# EAGLE board 00B-060 (EAGLE 6.3)
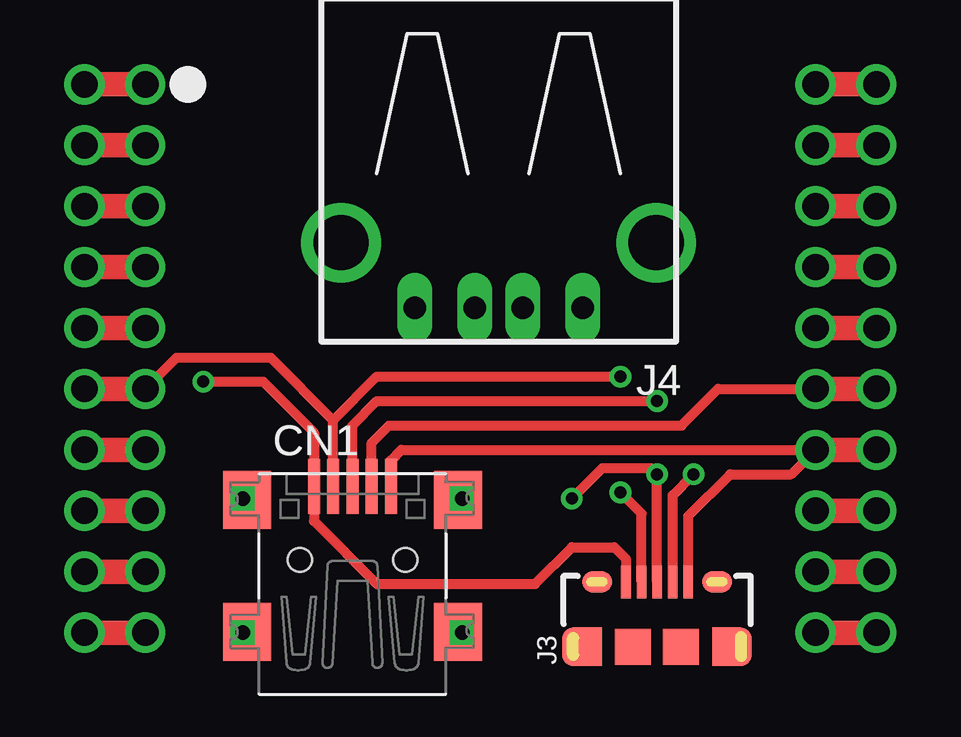
[diagram p0: board, top side]
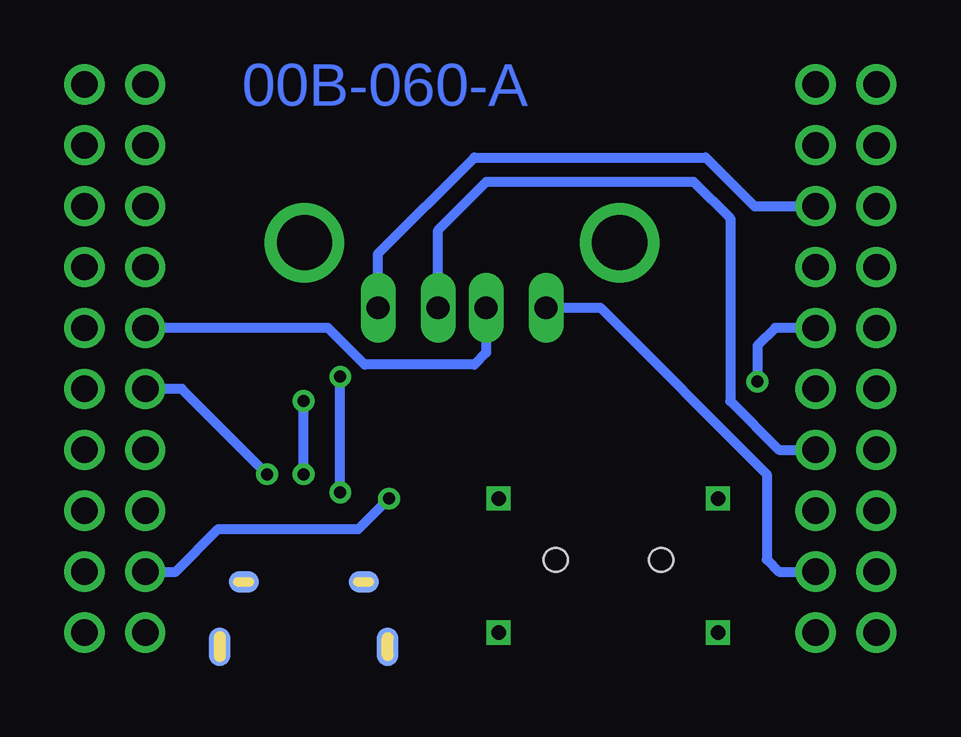
[diagram p1: board, bottom side, seen from below]

No outline drawn. Coordinates in mm, seen from the top.
Copper layers (1*16): Top 0.035mm / dielectric 1.5mm / Bottom 0.035mm
Design rules "default": minimum track width 10mil, minimum drill 24mil, track to track 8mil, track to pad 8mil, pad to pad 8mil, via to via 8mil, smd to smd 8mil, copper to edge 40mil, drill to drill 8mil, minimum pad ring 10mil, minimum via ring 8mil, stop-mask expansion 4mil, vias tented up to drill 0mil, thermal gap 10mil

## Footprints (pad centres in the part's own frame; a part is rotated, then mirrored left to right if it is on the bottom)
USB-MINIB = smd 0.5 x 2.308: D+ 0,4.064; D- -0.8,4.064; GND 1.6,4.064; ID 0.8,4.064; VBUS -1.6,4.064 | smd 2 x 2.4: GND1 -4.4,-2; GND2 -4.4,3.5; GND3 4.4,3.5; GND4 4.4,-2 | hole 1: -2.2,1; 2.2,1
USB_MICRO = smd 0.4 x 1.35: 1 -1.3,1.35; 2 -0.65,1.35; 3 0,1.35; 4 0.65,1.35; 5 1.3,1.35 | smd 1.25 x 0.9: GND1 -2.5,1.35; GND4 2.5,1.35 | smd 1.25 x 0.9 bottom: GND2 -2.5,1.35; GND3 2.5,1.35 | smd 0.9 x 1.6: GND5 -3.5,-1.35; GND8 3.5,-1.35 | smd 0.9 x 1.6 bottom: GND6 -3.5,-1.35; GND9 3.5,-1.35 | smd 1.2 x 1.6: GND7 -2.9,-1.35; GND10 2.9,-1.35 | smd 1.5 x 1.5: XPAD3 -1,-1.35; XPAD4 1,-1.35
TYPE-A-FEMALE = drill 0.95 long: D+ 1,2.71; D- -1,2.71; GND 3.5,2.71; VBUS -3.5,2.71 | drill 2.3 pad 2.9: S1 -6.57,0; S2 6.57,0
VIVA_SHIELD = drill 1.1 pad 1.676: 1.L 0,22.86; 1.R 2.54,22.86; 2.L 0,20.32; 2.R 2.54,20.32; 3.L 0,17.78; 3.R 2.54,17.78; 4.L 0,15.24; 4.R 2.54,15.24; 5.L 0,12.7; 5.R 2.54,12.7; 6.L 0,10.16; 6.R 2.54,10.16; 7.L 0,7.62; 7.R 2.54,7.62; 8.L 0,5.08; 8.R 2.54,5.08; 9.L 0,2.54; 9.R 2.54,2.54; 10.L 0,0; 10.R 2.54,0; 11.L 30.48,0; 11.R 33.02,0; 12.L 30.48,2.54; 12.R 33.02,2.54; 13.L 30.48,5.08; 13.R 33.02,5.08; 14.L 30.48,7.62; 14.R 33.02,7.62; 15.L 30.48,10.16; 15.R 33.02,10.16; 16.L 30.48,12.7; 16.R 33.02,12.7; 17.L 30.48,15.24; 17.R 33.02,15.24; 18.L 30.48,17.78; 18.R 33.02,17.78; 19.L 30.48,20.32; 19.R 33.02,20.32; 20.L 30.48,22.86; 20.R 33.02,22.86

## Placement (x,y rotation side)
CN1  [USB-MINIB]  13.22,4.07 0 top
J3  [USB_MICRO]  25.92,2.8 0 top
J4  [TYPE-A-FEMALE]  19.31,18.3 180 top
U$1  VIVA_PIC16SHIELD  [VIVA_SHIELD]  2.04,2.04 0 top

## Library data of the parts
CN1 = adafruit
J3 J4 U$1 = utsa

## Nets
N$5: J4.VBUS U$1.3.L U$1.3.R
N$6: J4.D+ U$1.16.L U$1.16.R
N$7: J4.D- U$1.7.L U$1.7.R
N$8: J4.GND U$1.9.L U$1.9.R
N$9: U$1.10.L U$1.10.R
N$10: CN1.VBUS J3.1 U$1.5.L U$1.5.R
N$11: CN1.D+ J3.3 U$1.12.L U$1.12.R
N$12: CN1.D- J3.2 U$1.6.L U$1.6.R
N$13: CN1.GND J3.5 U$1.14.L U$1.14.R
N$14: CN1.ID J3.4 U$1.15.L U$1.15.R

## Tracks (layer width: path | path; a pad name or v marks a point on that pad's centre or on a via)
N$1  (via drill 0.6)
  other vias: 17.79,2.04
N$2  (via drill 0.6)
  other vias: 8.64,2.04
N$3  (via drill 0.6)
  other vias: 8.64,7.63
N$4  (via drill 0.6)
  other vias: 17.79,7.63
N$5
  Bottom 0.406: J4.VBUS 22.81,17.84 18.8,21.85 9.15,21.85 7.12,19.82 U$1.3.R
N$6
  Bottom 0.406: J4.D+ 18.31,13.71 18.8,13.22 23.38,13.22 24.9,14.74 U$1.16.L
N$7
  Bottom 0.406: J4.D- 20.31,18.82 18.3,20.84 9.66,20.84 8.14,19.31 8.14,11.69 6.1,9.66 U$1.7.R
N$8
  Bottom 0.406: J4.GND 13.55,15.59 6.61,8.64 6.61,5.09 6.1,4.58 U$1.9.R
N$10  (via drill 0.5)
  Top 0.406: J3.1 24.62,5.12 24.14,5.6 22.36,5.6 20.84,4.07 14.23,4.07 11.62,6.69 CN1.VBUS 11.62,10.38 9.5,12.5 v7,12.5
  Bottom 0.406: U$1.5.R 6.26,14.74 7,14 v7,12.5
N$11  (via drill 0.5)
  Top 0.406: CN1.D+ 13.22,10.68 14.23,11.69 v25.92,11.69 | J3.3 v25.92,8.64 25.66,8.9 23.63,8.9 v22.36,7.63
  Bottom 0.406: v25.92,8.64 v25.92,11.69 | U$1.12.L 31.25,4.58 29.47,6.36 23.63,6.36 v22.36,7.63
N$12  (via drill 0.5)
  Top 0.406: CN1.D- 12.42,10.89 | 12.42,10.89 14.23,12.71 v24.39,12.71 | J3.2 25.27,7.01 v24.39,7.88 | U$1.6.R 5.88,13.5 9.81,13.5 12.42,10.89
  Bottom 0.406: v24.39,7.88 v24.39,12.71
N$13
  Top 0.406: CN1.GND 14.82,9.23 15.25,9.66 U$1.14.L 31.5,8.64 28.96,8.64 27.22,6.9 J3.5
N$14  (via drill 0.5)
  Top 0.406: CN1.ID 14.02,9.95 14.74,10.68 26.93,10.68 28.46,12.2 U$1.15.L | J3.4 26.57,7.77 v27.44,8.64
  Bottom 0.406: v27.44,8.64 31,12.2 U$1.15.L

## Text on the board
Bottom: 00B-060-A
_tNames: J4 | CN1 | J3